# Altium PCB FTDI ToolKit.PcbDoc
Units mil, origin at the board's own origin, x right, y up, seen from the top; angles counter-clockwise.
Board outline 2665 x 1825 mil, 2 copper layers (Top Layer, Bottom Layer); 82 components, 91 nets, 360 pads, 101 vias.
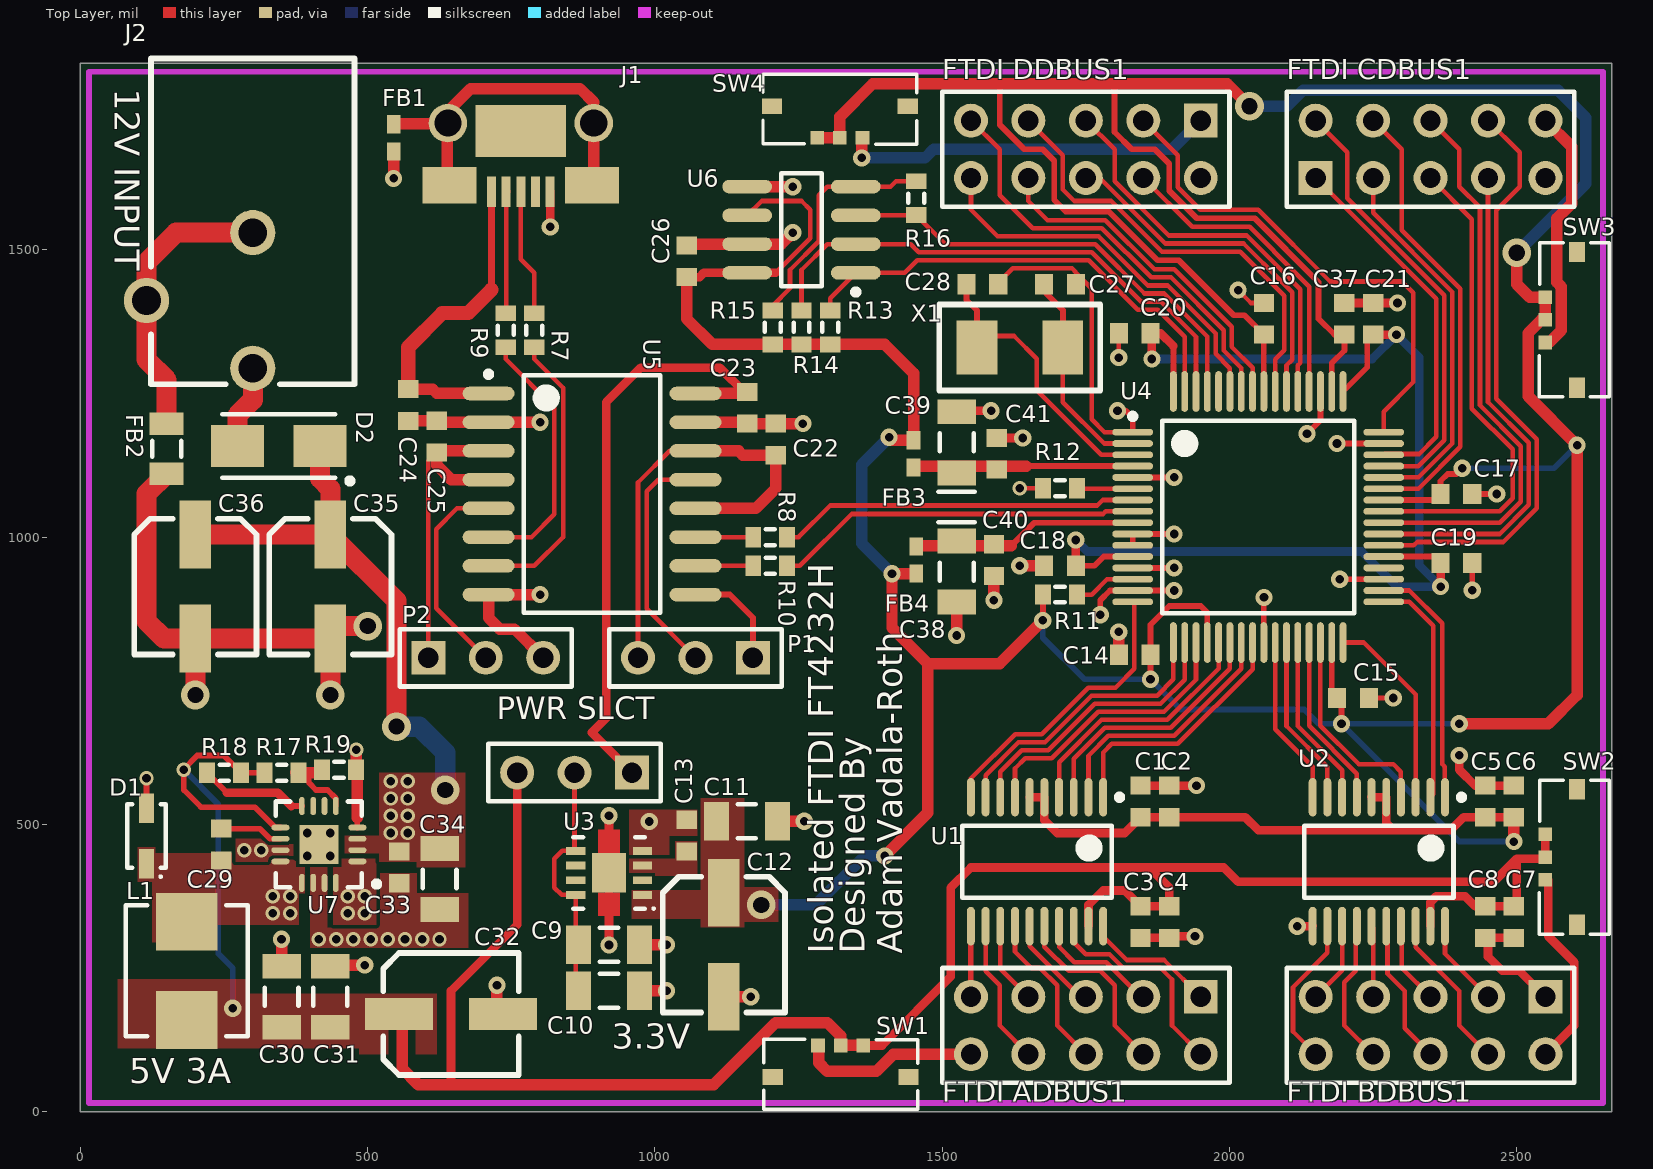
[diagram p0: Top Layer view]
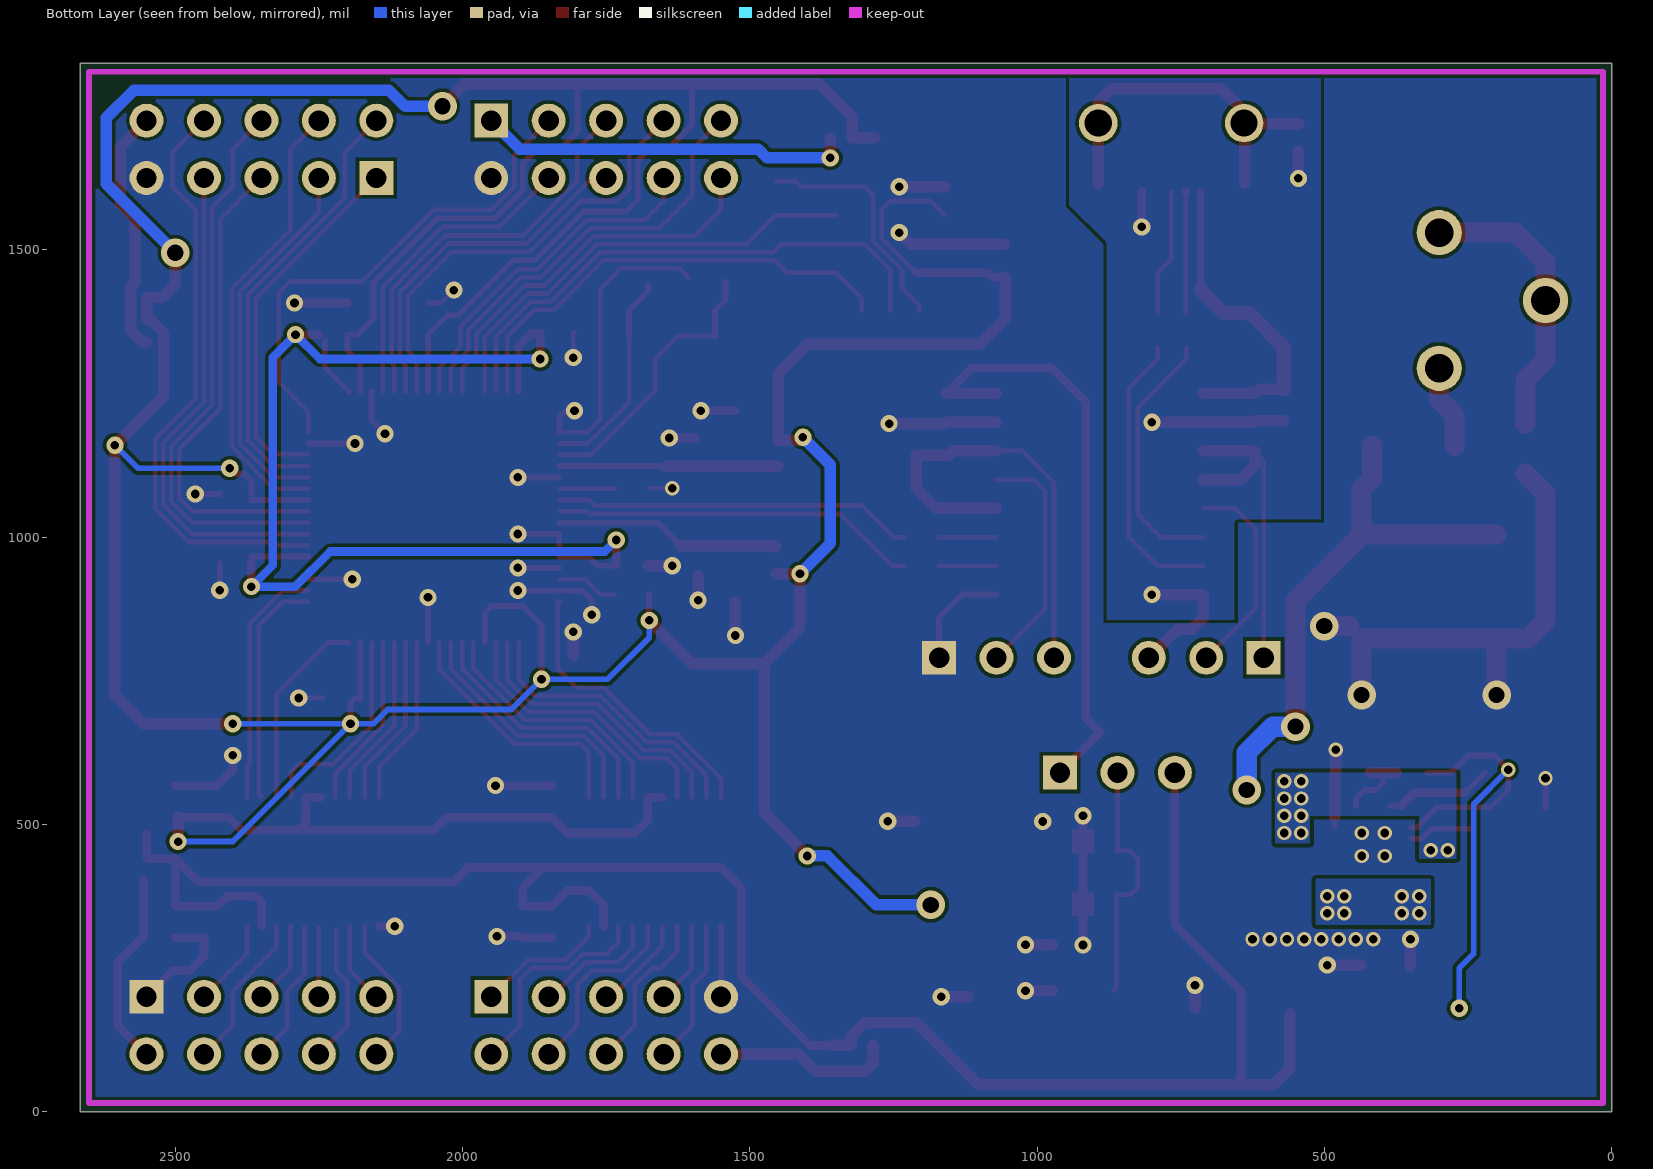
[diagram p1: Bottom Layer view, seen from below]

## Layer stack, top to bottom
Top Layer: signal copper 1.4
Dielectric: dielectric 12.6, FR-4, Dk 4.8
Bottom Layer: signal copper 1.4

## Board outline
0,0 0,1825 2665,1825 2665,0

## Design rules (kind name [scope] priority, off if disabled: settings)
Clearance [All] p1: gap=6
ComponentClearance [All] p1: gap=0 collisioncheckmode=3 verticalgap=10 showdistances=FALSE
FanoutControl Fanout_SOIC [(InComponent('U8') AND InComponent('U7'))] p3: bgadir=Out bgaviamode=Centered fanoutstyle=Staggered fanoutdirection=Alternating viagrid=1 // Fanout_SOIC (Default Rule)
FanoutControl Fanout_Small [All] p4: bgadir=Out bgaviamode=Centered fanoutstyle=Auto fanoutdirection=Alternating viagrid=1 // Fanout_Small (Default Rule)
HoleSize [All] p1: absolutevalues=TRUE maxlimit=120 minlimit=1 maxpercent=80.000 minpercent=20.000
MinimumSolderMaskSliver [All] p1 off: minsoldermaskwidth=10
PlaneConnect [All] p1: planeconnectstyle=Direct reliefexpansion=20 reliefentries=4 reliefconductorwidth=10 reliefairgap=10
PolygonConnect [All] p1: connectstyle=Direct reliefconductorwidth=45 reliefentries=4 polygonreliefangle="90 Angle" airgapwidth=10
RoutingVias [All] p1: holewidth=15 width=25 viastyle="Through Hole" minholewidth=15 minwidth=25 maxholewidth=28 maxwidth=50
SilkToSilkClearance [All] p1 off: silktosilkclearance=10
SilkToSolderMaskClearance SilkscreenOverComponentPads [IsPad] p1 off: minsilkscreentomaskgap=10 clearancetoexposedcopper=TRUE
SolderMaskExpansion [All] p1: expansion=4
Width [All] p1: maxlimit=200 minlimit=6 preferedwidth=6 minimp=50.000000 maximp=50.000000 favimp=50.000000
20 further rules are at their usual default settings.

## Classes and differential pairs
component class "FTDI ToolKit Ports": C1 C2 C3 C4 C5 C6 C7 C8 "FTDI ADBUS1" "FTDI BDBUS1" "FTDI CDBUS1" "FTDI DDBUS1" SW1 SW2 SW3 SW4 U1 U2
component class "FTDI ToolKit FTDI & USB": C9 C10 C11 C12 C13 C14 C15 C16 C17 C18 C19 C20 C21 C22 C23 C24 C25 C26 C27 C28 C29 C30 C31 C32 C33 C34 C35 C36 C37 C38 C39 C40 C41 D1 D2 FB1 FB2 FB3 FB4 J1 J2 L1 P1 P2 "PWR SLCT" R7 R8 R9 R10 R11 R12 R13 R14 R15 R16 R17 R18 R19 U3 U4 U5 U6 U7 X1

## Components (designator, comment, footprint, x,y, rotation, side; value= is the part's Value field where it differs from the comment)
C1 "0603" 1608[0603] 1845,540 r270 top
C2 "0603" 1608[0603] 1895,540 r270 top
C3 "0603" 1608[0603] 1845,330 r90 top
C4 "0603" 1608[0603] 1895,330 r90 top
C5 "0603" 1608[0603] 2445,540 r270 top
C6 "0603" 1608[0603] 2495,540 r270 top
C7 "0603" 1608[0603] 2495,330 r90 top
C8 "0603" 1608[0603] 2445,330 r90 top
C9 "1206 Tantulum" C1206 920,290.55 r0 top
C10 "1206 Tantulum" C1206 920,210.55 r180 top
C11 "1206 Tantulum" C1206 1160,505.55 r0 top
C12 "VS C" "Panasonic VS C" 1235,170.55 r90 top
C13 "0603" 1608[0603] 1055,480.55 r270 top
C14 "0603" 1608[0603] 1835,795 r0 top
C15 "0603" 1608[0603] 2215,720 r180 top
C16 "0603" 1608[0603] 2060,1380 r270 top
C17 "0603" 1608[0603] 2395,1075 r180 top
C18 "0603" 1608[0603] 1705,950 r0 top
C19 "0603" 1608[0603] 2395,955 r180 top
C20 "0603" 1608[0603] 1835,1355 r0 top
C21 "0603" 1608[0603] 2250,1380 r270 top
C22 "0603" 1608[0603] 1210.47,1170 r270 top
C23 "0603" 1608[0603] 1160.47,1225 r90 top
C24 "0603" 1608[0603] 570.47,1230 r90 top
C25 "0603" 1608[0603] 620.47,1175 r270 top
C26 "0603" 1608[0603] 1055,1480 r270 top
C27 "0603" 1608[0603] 1705,1440 r180 top
C28 "0603" 1608[0603] 1570,1440 r180 top
C29 "Cap Semi" 1608[0603] 245,465 r90 top
C30 "1206" C1206 350,200 r270 top
C31 "Cap Semi" C1206 435,200 r90 top
C32 "VS C" "Panasonic VS C" 765,285 r180 top
C33 "0603" 1608[0603] 555,425 r90 top
C34 "1206" C1206 625,405 r90 top
C35 "VS C" "Panasonic VS C" 550,793.78 r90 top
C36 "VS C" "Panasonic VS C" 315,793.78 r90 top
C37 "0603" 1608[0603] 2200,1380 r270 top
C38 "1206" C1206POL 1525,940 r270 top
C39 "1206" C1206POL 1525,1165 r90 top
C40 "0603" 1608[0603] 1590,960 r90 top
C41 "0603" 1608[0603] 1595,1145 r270 top
D1 "PMEG1030EH_EJ" PMEG1030EH_EJ 115,480 r270 top
D2 "PMEG4050EP" PMEG4050EP 345,1158.78 r180 top
FB1 "BLM18PG121SN1D" BLM18PG121SN1D 545,1695 r270 top
FB2 "MI0805L301R-10" "SM 0805 - gap trimmed" 150,1153.78 r90 top
FB3 "BLM18PG121SN1D" BLM18PG121SN1D 1450,1145 r90 top
FB4 "BLM18PG121SN1D" BLM18PG121SN1D 1455,960 r270 top
"FTDI ADBUS1" "Header 5X2" HDR2X5 1950,200 r180 top
"FTDI BDBUS1" "Header 5X2" HDR2X5 2550,200 r180 top locked
"FTDI CDBUS1" "Header 5X2" HDR2X5 2150,1625 r0 top locked
"FTDI DDBUS1" "Header 5X2" HDR2X5 1950,1725 r180 top locked
J1 "DX4R005J91R5100" "Micro USB Circular Holes Only" 765.47,1760 r180 top
J2 "Center-positive 2.1 mm power jack" PJ-102AH 300,1293.78 r0 top
L1 "Inductor" CIP0530LR3R3 185,245 r270 top
P1 "Header 3" HDR1X3 1170.47,790 r180 top
P2 "Header 3" HDR1X3 605.47,790 r0 top
"PWR SLCT" "Header 3" HDR1X3 960,590 r180 top
R7 "0603" J1-0603 790,1360 r270 top
R8 "0603" J1-0603 1200.47,1000 r0 top
R9 "0603" J1-0603 740,1360 r270 top
R10 "0603" J1-0603 1200.47,950 r0 top
R11 "0603" J1-0603 1705,900 r180 top
R12 "0603" J1-0603 1705,1085 r180 top
R13 "0603" J1-0603 1305,1365 r270 top
R14 "0603" J1-0603 1255,1365 r270 top
R15 "0603" J1-0603 1205,1365 r270 top
R16 "0603" J1-0603 1455,1590 r270 top
R17 "Res3" J1-0603 350,590 r180 top
R18 "Res3" J1-0603 250,590 r180 top
R19 "Res3" J1-0603 450,595 r180 top
SW1 "SSAJ120100" SSAJ120100 1205,60 r0 top
SW2 "SSAJ120100" SSAJ120100 2605,325 r90 top
SW3 "SSAJ120100" SSAJ120100 2605,1260 r90 top
SW4 "SSAJ120100" SSAJ120100 1440,1750 r180 top
U1 "TXB0108" TXB0108 1665,435 r270 top
U2 "TXB0108" TXB0108 2260,435 r270 top
U3 "TPS73733QDRBRQ1" TI-DRB8-1750X1500TP_V 920,415.55 r180 top
U4 "FT4232HL-Reel" LQFP-64_N 2050,1035 r0 top
U5 "ADuM4160" ADuM4160 890.47,1075 r0 top
U6 "AT93C46" SOIC127P600X175-8N 1255,1535 r180 top
U7 "MIC24085" MIC24085-AYML 415,465 r180 top
X1 "12MHZ" 445C35A12M00000 1710,1330 r180 top

## Footprints (in the part's own frame and the unit in brackets; to place one, negate y for a bottom-side part, rotate by r counter-clockwise, add the part's x,y. Pads: shape width x height; smd on the part's side, far side on the other; paste and mask are expansions set on the pad)
445C35A12M00000 [mm] "Crystal Oscillator"
  rect 1.8x2.4 smd: 1(0,0) 2(3.8,0)
  silkscreen extent -1.65,-1.91 5.46,1.91, body extent -1.27,-1.52 5.08,1.52, height 1
1608[0603] [mm] "Chip Capacitor, Body 1.6x0.8mm, IPC High Density"
  rect 0.8x0.9 smd: 1(-0.7,0) 2(0.7,0)
  body extent -0.87,-0.48 0.87,0.48, height 1.3
ADuM4160 [mm] "SOIC, 16-Leads, Body 10.30x7.50mm, Pitch 1.27mm, IPC Medium Density"
  oval 2.3x0.6 smd: 1(-4.575,4.445) 2(-4.575,3.175) 3(-4.575,1.905) 4(-4.575,0.635) 5(-4.575,-0.635) 6(-4.575,-1.905) 7(-4.575,-3.175) 8(-4.575,-4.445) 9(4.575,-4.445) 10(4.575,-3.175) 11(4.575,-1.905) 12(4.575,-0.635) 13(4.575,0.635) 14(4.575,1.905) 15(4.575,3.175) 16(4.575,4.445)
  silkscreen extent -4.7,-5.25 3.03,5.42, body extent -3.8,-5.25 3.8,5.25, height 2.65
BLM18PG121SN1D [mm] "Chip Inductor, 2-Leads, Body 1.0x0.5mm, IPC Medium Density"
  rect 0.8x0.6 smd: 1(-0.6,0) 2(0.6,0)
  body extent -0.52,-0.28 0.53,0.27, height 0.6
C1206 [mm] "Chip Capacitor, Body 3.2x1.6mm, IPC High Density"
  rect 1.1x1.7 smd: 1(-1.35,0) 2(1.35,0)
  silkscreen extent -0.4,-0.75 0.4,0.75, body extent -1.7,-0.9 1.7,0.9, height 1.3
C1206POL [mm] "Chip Capacitor, Body 3.2x1.6mm, IPC High Density"
  rect 1.1x1.7 smd: 1(-1.35,0) 2(1.35,0)
  silkscreen extent -2.18,-0.8 0.4,0.8, body extent -1.7,-0.9 1.7,0.9, height 1.3
CIP0530LR3R3 [mm] "Precision Wire Wound Inductor, 2-Leads, Body 5.58x5.30mm, IPC Medium Density"
  rect 2.55x2.7 smd: 1(-2.175,0) 2(2.175,0)
  silkscreen extent -2.9,-2.7 2.9,2.7, body extent -2.88,-2.7 2.88,2.7, height 2.29
HDR1X3 [mm] "Connector; Header; 3 Position"
  rect 1.5x1.5 hole 0.9: 1(0,0)
  round 1.5 hole 0.9: 2(2.54,0) 3(5.08,0)
  silkscreen extent -1.27,-1.27 6.35,1.27
HDR2X5 [mm] "Connector; Header; 5x2 Position"
  rect 1.5x1.5 hole 0.9: 1(0,0)
  round 1.5 hole 0.9: 2(0,2.54) 3(2.54,0) 4(2.54,2.54) 5(5.08,0) 6(5.08,2.54) 7(7.62,0) 8(7.62,2.54) 9(10.16,0) 10(10.16,2.54)
  silkscreen extent -1.27,-1.27 11.43,3.81
J1-0603 [mm] "Chip Resistor, Body 1.6x0.8mm, IPC High Density"
  rect 0.7x0.9 smd: 1(-0.75,0) 2(0.75,0)
  silkscreen extent -0.2,-0.35 0.2,0.35, body extent -0.85,-0.48 0.85,0.48, height 0.9
LQFP-64_N [mm] "Thin QFP, 64-Leads, Body 10x10mm, Pitch 0.5mm, IPC Medium Density"
  oval 1.8x0.3 smd: 1(-5.55,3.75) 2(-5.55,3.25) 3(-5.55,2.75) 4(-5.55,2.25) 5(-5.55,1.75) 6(-5.55,1.25) 7(-5.55,0.75) 8(-5.55,0.25) 9(-5.55,-0.25) 10(-5.55,-0.75) 11(-5.55,-1.25) 12(-5.55,-1.75) 13(-5.55,-2.25) 14(-5.55,-2.75) 15(-5.55,-3.25) 16(-5.55,-3.75) 33(5.55,-3.75) 34(5.55,-3.25) 35(5.55,-2.75) 36(5.55,-2.25) 37(5.55,-1.75) 38(5.55,-1.25) 39(5.55,-0.75) 40(5.55,-0.25) 41(5.55,0.25) 42(5.55,0.75) 43(5.55,1.25) 44(5.55,1.75) 45(5.55,2.25) 46(5.55,2.75) 47(5.55,3.25) 48(5.55,3.75)
  oval 0.3x1.8 smd: 17(-3.75,-5.55) 18(-3.25,-5.55) 19(-2.75,-5.55) 20(-2.25,-5.55) 21(-1.75,-5.55) 22(-1.25,-5.55) 23(-0.75,-5.55) 24(-0.25,-5.55) 25(0.25,-5.55) 26(0.75,-5.55) 27(1.25,-5.55) 28(1.75,-5.55) 29(2.25,-5.55) 30(2.75,-5.55) 31(3.25,-5.55) 32(3.75,-5.55) 49(3.75,5.55) 50(3.25,5.55) 51(2.75,5.55) 52(2.25,5.55) 53(1.75,5.55) 54(1.25,5.55) 55(0.75,5.55) 56(0.25,5.55) 57(-0.25,5.55) 58(-0.75,5.55) 59(-1.25,5.55) 60(-1.75,5.55) 61(-2.25,5.55) 62(-2.75,5.55) 63(-3.25,5.55) 64(-3.75,5.55)
  silkscreen extent -5.67,-4.25 4.25,4.57, body extent -5,-5 5,5, height 1.6
MIC24085-AYML [mm] "QFN, 16-Leads, Body 3.25x3.25mm, Pitch 0.50mm, Thermal Pad 1.73x1.73mm, IPC Medium Density"
  oval 0.8x0.25 smd: 1(-1.7,0.75) 2(-1.7,0.25) 3(-1.7,-0.25) 4(-1.7,-0.75) 9(1.7,-0.75) 10(1.7,-0.25) 11(1.7,0.25) 12(1.7,0.75)
  oval 0.25x0.8 smd: 5(-0.75,-1.7) 6(-0.25,-1.7) 7(0.25,-1.7) 8(0.75,-1.7) 13(0.75,1.7) 14(0.25,1.7) 15(-0.25,1.7) 16(-0.75,1.7)
  rect 1.73x1.73 smd: 17(0,0)
  silkscreen extent -2.68,-1.9 1.9,1.9, body extent -1.75,-1.75 1.75,1.75, height 0.85
"Micro USB Circular Holes Only" [mm]
  rect 0.4x1.35 smd: 1(1.275,4.025) 2(0.625,4.025) 3(-0.025,4.025) 4(-0.675,4.025) 5(-1.325,4.025)
  rect 2.4x1.6 smd: 6(3.125,3.75) 9(-3.175,3.75)
  round 1.7 hole 1.2: 7(3.2,1) 8(-3.25,1)
  rect 4x2.3 smd: GND(-0.025,1.35)
  body extent -4.1,-1.64 4.1,3.79, height 2.73
"Panasonic VS C" [mm]
  rect 3x1.4 smd: 1(5.348,2.921) 2(0.748,2.921)
  silkscreen extent 0.05,0.22 6.05,5.62
PJ-102AH [mm] "Center positive 2.1 mm power jack"
  round 2 hole 1.27: 1(0,0) 2(0,6) 3(-4.7,3)
  silkscreen extent -4.5,-0.7 4.5,13.7, body extent -5.8,-0.7 4.5,13.7, height 11
PMEG1030EH_EJ [mm] "Molded Diode, 2-Leads, Body 2.60x1.60mm, IPC Medium Density"
  rect 1.3x0.65 smd: 1(-1.225,0) 2(1.225,0)
  silkscreen extent -1.4,-0.85 1.85,0.85, body extent -1.35,-0.85 1.35,0.85, height 1.2
PMEG4050EP [mm] "PMEG4050EP NXP SMD Schottky Diode"
  rect 2.35x1.85 smd: 1(-1.825,0) 2(1.825,0)
  silkscreen extent -3.28,-1.4 2.5,1.67, body extent -2.5,-1.35 2.5,1.35, height 1.1
"SM 0805 - gap trimmed" [mm]
  rect 1x1.5 smd: 1(-1.1,0) 2(1.1,0)
  silkscreen extent -0.36,-0.64 0.35,0.63
SOIC127P600X175-8N [mm] "SOIC, 8-Leads, Body 4.90x3.90mm, Pitch 1.27mm, IPC Medium Density"
  oval 2.2x0.6 smd: 1(-2.4,1.905) 2(-2.4,0.635) 3(-2.4,-0.635) 4(-2.4,-1.905) 5(2.4,-1.905) 6(2.4,-0.635) 7(2.4,0.635) 8(2.4,1.905)
  silkscreen extent -2.53,-2.5 0.9,2.88, body extent -2,-2.5 2,2.5, height 1.75
SSAJ120100 [mm] "SSAJ120100"
  rect 0.6x0.6 smd: 1(2,1.4) 2(3,1.4) 3(4,1.4)
  rect 0.9x0.7 smd: ""(0,0) ""(6,0)
  silkscreen extent -0.41,-1.42 6.4,1.68, body extent -0.25,-2.47 6.25,1.5, height 0.7
TI-DRB8-1750X1500TP_V [mm] "SON, 8-Leads, Body 3x3mm, Pitch 0.65mm, Thermal Pad 1.50 x 3.8mm"
  rect 0.85x0.35 smd: 1(-1.475,0.975) 2(-1.475,0.325) 3(-1.475,-0.325) 4(-1.475,-0.975) 5(1.475,-0.975) 6(1.475,-0.325) 7(1.475,0.325) 8(1.475,0.975)
  rect 1.5x1.75 smd: 9(0,0)
  Top Layer region: 0.185,0.875 0.185,1.9 0.465,1.9 0.465,0.875
  Top Layer region: -0.185,-0.875 -0.185,-1.9 -0.465,-1.9 -0.465,-0.875
  Top Layer region: 0.185,-0.875 0.185,-1.9 0.465,-1.9 0.465,-0.875
  Top Layer region: -0.185,0.875 -0.185,1.9 -0.465,1.9 -0.465,0.875
  silkscreen extent -2.02,-1.58 1.57,1.62, body extent -1.5,-1.5 1.5,1.5, height 1
TXB0108 [mm] "TSOP, 20-Leads, Body 6.50x4.40mm, Pitch 0.65mm, IPC Medium Density"
  oval 1.7x0.35 smd: 1(-2.85,2.925) 2(-2.85,2.275) 3(-2.85,1.625) 4(-2.85,0.975) 5(-2.85,0.325) 6(-2.85,-0.325) 7(-2.85,-0.975) 8(-2.85,-1.625) 9(-2.85,-2.275) 10(-2.85,-2.925) 11(2.85,-2.925) 12(2.85,-2.275) 13(2.85,-1.625) 14(2.85,-0.975) 15(2.85,-0.325) 16(2.85,0.325) 17(2.85,0.975) 18(2.85,1.625) 19(2.85,2.275) 20(2.85,2.925)
  silkscreen extent -2.97,-3.3 1.6,3.78, body extent -2.25,-3.3 2.25,3.3, height 1.2

## Part data
C1 C2 C3 C4 C5 C6 C7 C8 C9 C10 C11 C12 C13 C14 C15 C16 C17 C18 C19 C20 C21 C22 C23 C24 C25 C26 C27 C28 C30 C32 C33 C34 C37 C40 C41: library part "Cap Semi", "Capacitor (Semiconductor SIM Model)"
C29 C31: "Capacitor (Semiconductor SIM Model)"
C35 C36 C38 C39: library part "Cap Pol3", "Polarized Capacitor (Surface Mount)"
D1 D2: library part Diode, "Default Diode"
FB2: library part Inductor, "Inductor"
"FTDI ADBUS1" "FTDI BDBUS1" "FTDI CDBUS1" "FTDI DDBUS1": "Header, 5-Pin, Dual row"
J1: library part "Micro USB", "Micro USB Jack B"
J2: library part PWR2.5, "Power jack"
P1 P2 "PWR SLCT": "Header, 3-Pin"
R7 R8 R9 R10 R11 R12 R13 R14 R15 R16: library part Res3, "Resistor"
R17 R18 R19: "Resistor"
SW1 SW2 SW3 SW4: "Slide Switch SMD"
U1 U2: "Ti TXB0108 Bidirectional Level Translator"
U3: "Single Output Automotive LDO, 1 A, Fixed 3.3 V Output, 2.2 to 5.5 V Input, with Reverse Current Protection, 8-pin SON (DRB), -40 to 125 degC, Green (RoHS & no Sb/Br)"
U4: "Quad High Speed USB To Multipurpose UART/MPSSE IC, 64-pin LQFP, Tape and Reel"
U5: "USB Opto Isolator"
X1: library part XTAL, "Crystal Oscillator"

## Via types
v1: diameter 30, hole 15, Top Layer to Bottom Layer, 59 vias
v2: diameter 25, hole 15, Top Layer to Bottom Layer, 34 vias
v3: diameter 50, hole 28, Top Layer to Bottom Layer, 8 vias

## Nets (pads, with @x,y where several pads share a name; then routed paths per layer and width w, separated by ;. In a path a pad name is that pad's centre, name@x,y a point inside that pad or via, vN(x,y) a via of type N, cw(c..) or ccw(c..) an arc to the next point about the centre after c; other vN are vias at no path point)
3.3VCC: C1.2 C2.2 C5.2 C6.2 C11.1 C12.1 C14.2 C15.2 C16.2 C17.2 C26.2 C37.2 FB3.2 FB4.2 R11.2 R13.2 R14.2 R15.2 SW3.2 SW3.3 SW4.2 SW4.3 U1.5 U1.6 U2.5 U2.6 U3.1 U4.20 U4.31 U4.42 U4.50 U4.56 U6.6 U6.8 | length 9963.9
  Top Layer w8: U6.6 1185.51,1585 1255,1585 1270,1570 1270,1520 1210,1460
  Top Layer w10: 1600,1788.75 1600,1717.69 1642.69,1675 1675,1675 1695,1655 1695,1586.72 1715,1566.72 1789.9,1566.72 1874.62,1482 1911.79,1482 2007.57,1386.22 2026.22,1386.22 C16.2@2059.84,1352.6 ; v1@1675.47,855.47 R11.2 ; 1800,1780 1800,1705 1830,1675 1870,1675 1895,1650 1895,1602.89 1942.89,1555 2043.79,1555 2155,1443.79 2155,1380 2182.56,1352.44 C37.2 2200,1325 2177.95,1302.95 U4.50 ; v1(1862.56,752.44) C14.2 1862.56,847.56 1895,880 1950,880 1961.42,868.58 U4.20 ; U4.56 C16.2@2059.84,1352.6 ; C16.2 C16.2@2059.84,1352.6 ; C15.2@2177.95,717.09 U4.31 ; C15.2 2195,712.44 v1(2195,675) ; U4.42 C17.2@2367.91,1064.53 ; C17.2 2367.44,1097.44 2380,1110 2395,1110 v1(2405,1120)
  Top Layer w15: C26.2 1077.44,1452.44 1085,1460 U6.8 1210,1460 ; U1.6 U1.5 1677.8,507.2 1700,485 1817.56,485 C1.2 C2.2 2027.56,512.44 2050,490 2285,490 ; U2.6 U2.5 2272.8,502.2 2285,490 ; C6.2 C5.2 2407.44,512.44 2385,490 2285,490
  Top Layer w20: C26.2 1055,1380 1099.53,1335.47 R15.2 R14.2 R13.2 1399.53,1335.47 1450,1285 FB3.2 1412.56,1168.62 v1(1407.56,1173.62) ; SW4.3 SW4.2 1321.89,1731.89 1378.75,1788.75 1600,1788.75 1996.25,1788.75 v3(2035,1750) ; v1(1400,445) 1475,520 1475,780 ; FB4.2 v1(1412.56,936.38) 1412.56,842.44 1475,780 ; v1@1675.47,855.47 v1(1675,855) 1600,780 1475,780 ; v1(2400,675) 2555,675 2605,725 v1(2605,1160) 2520,1245 2520,1355.11 2543,1378.11 SW3.2 SW3.3 2522.52,1417.48 2500,1440 v3(2500,1495) ; v1(2495,470) C6.2
  Bottom Layer w10: v1(1675,855) 1675,825 1747.56,752.44 v1(1862.56,752.44) 1915,700 2130,700 2155,675 v1(2195,675) ; v1(2400,675) v1(2195,675) ; v1(2405,1120) 2565,1120 v1(2605,1160) ; v1(2495,470) 2400,470 v1(2195,675)
  Bottom Layer w20: v3(1185,360) 1280,360 1365,445 v1(1400,445) ; v1(1407.56,1173.62) 1360,1126.06 1360,988.94 v1(1412.56,936.38) ; v3(2035,1750) 2100.01,1750 2128.04,1778.03 2571.96,1778.03 2620,1729.99 2620,1615 v3(2500,1495)
5VCC: "PWR SLCT.3" C3.2 C4.2 C7.2 C8.2 C30.2 C31.1 C32.1 L1.2 R17.2 R18.1 SW1.2 SW1.3 SW2.2 SW2.3 U1.19 U2.19 U7.9 | length 4441.5
  Top Layer w10: R17.2 R18.1 249.53,620 203.42,620 180,596.58 v2(180,595) 180,560 210,530 303.43,530 338.9,494.53 U7.9
  Top Layer w15: 645,46.97 645,210 760,325 760,590 ; SW1.3@1357.48,115.12 1395.12,115.12 1515,235 1515,390 1550,425 1860,425 ; U1.19 1754.57,359.57 1780,385 1817.56,385 C3.2@1842.56,360 ; C3.2 C4.2 1895,390 1860,425 ; U2.19 2349.57,364.57 2360,375 2410,375 2427.44,357.56 C8.2 C7.2 ; C7.2@2500,357.56 2500,440 ; SW2.2 2546.77,440 2500,440 ; SW2.2@2549.88,450 SW2.3 ; 1860,425 1990,425 2015,400 2460,400 2500,440
  Top Layer w20: C32.1@560,170 560,75 588.03,46.97 645,46.97 1101.97,46.97 1210,155 1300,155 1323.11,131.89 SW1.2 SW1.3@1357.48,115.12
  Bottom Layer w10: v2(180,595) 240,535 240,275 265,250 v1(265,180)
ASBUS0: U1.10 U4.16 | length 513.9
  Top Layer w8: U1.10 1549.84,579.84 1627,657 1673.01,657 1754.01,738 1801.59,738 1834.19,770.6 U4.16@1834.19,884.67
  Top Layer w10: U4.16 U4.16@1834.19,884.67
ASBUS1: U1.9 U4.17 | length 498.6
  Top Layer w8: U1.9 1575.43,585.63 1632.8,643 1678.8,643 1759.8,724 1874,724 1902.36,752.36 U4.17
ASBUS2: U1.8 U4.18 | length 496.2
  Top Layer w8: U1.8 1601.02,591.43 1638.6,629 1684.6,629 1765.6,710 1880,710 1922.05,752.05 U4.18
ASBUS3: U1.7 U4.19 | length 493.9
  Top Layer w8: U1.7 1626.61,597.22 1644.4,615 1690.4,615 1771.4,696 1886,696 1941.73,751.73 U4.19
ASBUS4: U1.4 U4.21 | length 451.5
  Top Layer w8: U1.4 1703.39,608.18 1777.2,682 1891.8,682 1981.1,771.3 U4.21
ASBUS5: U1.3 U4.22 | length 449.2
  Top Layer w8: U1.3 1728.98,613.98 1783,668 1898,668 2000.79,770.79 U4.22
ASBUS6: U1.2 U4.23 | length 446.6
  Top Layer w8: U1.2 1754.57,619.37 1789.2,654 1903.8,654 2020.47,770.67 U4.23
ASBUS7: U1.1 U4.24 | length 444.4
  Top Layer w8: U1.1 1780.16,625.16 1795,640 1910,640 2040.16,770.16 U4.24
BDBUS0: U2.10 U4.26 | length 296.3
  Top Layer w8: U4.26 2079.53,665.47 2144.84,600.16 U2.10
BDBUS1: U2.9 U4.27 | length 298.8
  Top Layer w8: U4.27 2099.21,671.19 2170.43,599.97 U2.9
BDBUS2: U2.8 U4.28 | length 301.2
  Top Layer w8: U4.28 2118.9,671.3 2196.02,594.18 U2.8
BDBUS3: U2.7 U4.29 | length 303.7
  Top Layer w8: U4.29 2138.58,671.42 2221.61,588.39 U2.7
BDBUS4: U2.4 U4.30 | length 362.5
  Top Layer w8: U4.30 2158.27,671.73 2225,605 2285,605 2298.39,591.61 U2.4
BDBUS5: U2.3 U4.32 | length 342.6
  Top Layer w8: U4.32 2233.5,816.5 2323.98,726.02 U2.3
BDBUS6: U2.2 U4.33 | length 403.8
  Top Layer w8: U4.33 2312.84,887.36 2354.57,845.63 2354.57,552.2 U2.2
BDBUS7: U2.1 U4.34 | length 430.1
  Top Layer w8: U4.34 2312.95,907.05 2370,850 2370,605 2375,600 2375,547.36 U2.1
CDBUS0: "FTDI CDBUS1.8" U4.38 | length 1037.1
  Top Layer w8: U4.38 2320.79,985.79 2326.47,991.47 2476.22,991.47 2535,1050.25 2535,1170 2464,1241 2464,1569 2505,1610 2505,1670 2450,1725
CDBUS1: "FTDI CDBUS1.7" U4.39 | length 871.8
  Top Layer w8: U4.39 2470.43,1005.47 2521,1056.05 2521,1164.2 2450,1235.2 2450,1625
CDBUS2: "FTDI CDBUS1.6" U4.40 | length 981.9
  Top Layer w8: U4.40 2470.31,1025.16 2507,1061.85 2507,1158.4 2436,1229.4 2436,1574 2400,1610 2400,1675 2350,1725
CDBUS3: "FTDI CDBUS1.5" U4.41 | length 850.5
  Top Layer w8: U4.41 2470.2,1044.84 2493,1067.64 2493,1152.6 2422,1223.6 2422,1553 2350,1625
CDBUS4: "FTDI CDBUS1.4" U4.43 | length 794.5
  Top Layer w8: 2250,1725 2300,1675 2300,1534.4 2402,1432.4 2402,1157.17 2329.05,1084.21 U4.43
CDBUS5: "FTDI CDBUS1.3" U4.44 | length 663.2
  Top Layer w8: 2250,1625 2250,1564.6 2388,1426.6 2388,1162.96 2328.93,1103.9 U4.44
CDBUS6: "FTDI CDBUS1.2" U4.45 | length 773.2
  Top Layer w8: 2150,1725 2205,1670 2205,1589.8 2374,1420.8 2374,1168.76 2328.82,1123.58 U4.45
CDBUS7: "FTDI CDBUS1.1" U4.46 | length 641.9
  Top Layer w8: 2150,1625 2360,1415 2360,1174.56 2330.15,1144.72 2269.95,1144.72 U4.46
DDBUS0: "FTDI DDBUS1.3" U4.48 | length 890.7
  Top Layer w8: 1850,1725 1910,1665 1910,1609.1 1949.1,1570 2050,1570 2175,1445 2300,1445 2320,1425 2320,1270 2268.5,1218.5 U4.48
DDBUS1: "FTDI DDBUS1.4" U4.52 | length 549.6
  Top Layer w8: 1850,1625 1935,1540 2035,1540 2119,1456 2119,1455.56 2138.58,1435.98 U4.52
DDBUS2: "FTDI DDBUS1.5" U4.53 | length 707.4
  Top Layer w8: 1750,1725 1800,1675 1800,1619.1 1894.1,1525 2030.2,1525 2105,1450.2 2105,1449.76 2123,1431.76 2123,1303 2118.9,1298.9 U4.53
DDBUS3: "FTDI DDBUS1.6" U4.54 | length 618.2
  Top Layer w8: 1750,1625 1774.3,1625 1888.3,1511 2024.4,1511 2091,1444.4 2091,1443.96 2109,1425.96 2109,1309 2099.21,1299.21 U4.54
DDBUS4: "FTDI DDBUS1.7" U4.55 | length 779.7
  Top Layer w8: 1650,1725 1710,1665 1710,1605 1730,1585 1794.5,1585 1882.5,1497 2018.6,1497 2077,1438.6 2077,1438.17 2095,1420.17 2095,1325 2079.53,1309.53 U4.55
DDBUS5: "FTDI DDBUS1.8" U4.57 | length 612.2
  Top Layer w8: 1650,1625 1650,1585 1683.28,1551.72 1783.69,1551.72 1869.4,1466 1904,1466 2004,1366 2004,1331 2040.16,1294.84 U4.57
DDBUS6: "FTDI DDBUS1.9" U4.58 | length 757.3
  Top Layer w8: 1550,1725 1600,1675 1600,1595 1657.28,1537.72 1777.89,1537.72 1863.6,1452 1898.2,1452 1990,1360.2 1990,1324.8 2020.47,1294.33 U4.58
DDBUS7: "FTDI DDBUS1.10" U4.59 | length 681.5
  Top Layer w8: 1550,1625 1550,1570 1596.28,1523.72 1772.09,1523.72 1857.8,1438 1892.4,1438 1976,1354.4 1976,1319 2000.79,1294.21 U4.59
FB: R17.1 R19.2 U7.5 | length 134.9
  Top Layer w10: 397.26,590 397.26,572.74 410,560 430.11,560 444.53,545.59 U7.5
  Top Layer w20: R17.1@374.53,590 R19.2@420,590
GND: "FTDI ADBUS1.9" "FTDI BDBUS1.1" "FTDI CDBUS1.9" "FTDI DDBUS1.2" C1.1 C2.1 C3.1 C4.1 C5.1 C6.1 C7.1 C8.1 C9.2 C10.1 C11.2 C12.2 C13.1 C14.1 C15.1 C16.1 C17.1 C18.1 C19.1 C20.1 C21.1 C22.1 C23.1 C26.1 C27.1 C28.1 C30.1 C31.2 C32.2 C33.1 C34.1 C35.2 C36.2 C37.1 C38.2 C39.2 C40.1 C41.1 D1.1 FB2.1 P1.1 R12.2 R19.1 U1.11 U2.11 U3.4 U3.9 U4.1 U4.5 U4.10 U4.11 U4.13 U4.15 U4.25 U4.35 U4.47 U4.51 U5.9 U5.15 U6.5 U6.7 U7.4 U7.14 U7.15 U7.17 | length 4826.6
  Top Layer w8: C28.1@1606.28,1451.28 1622.72,1467.72 1725.82,1467.72 1732.56,1460.97 ; v2(1635,1085) R12.2 ; 1732.56,1460 1760,1432.56 1760,1205 1782.36,1182.64 U4.1 ; C20.1@1805,1357.44 C20.1 v1(1807.44,1312.44) ; v1(2015,1430) 2037.44,1407.56 C16.1 ; C15.1 v1(2285.12,720)
  Top Layer w10: D1.1 v2(115,580) ; U7.4 481.93,511.93 ; U5.9 1130,900 1170.47,859.53 P1.1 ; U1.11 1549.84,200.16 1550,200 ; v1(1775,865) 1775,890 1792.05,907.05 U4.15 v1(1903.58,907.05) ; v1(1805,1220) 1820,1220 1831.5,1208.5 U4.1 ; U4.13 v1(1903.58,946.42) ; U4.11 U4.10 v1(1903.58,1005.47) ; U4.5 v1(1903.58,1103.9) ; U4.25 v1@2059.84,894.84 ; v1(2135,1180) 2158.27,1203.27 U4.51 ; v1(2187.05,1162.95) U4.47 ; v1(2191.73,926.73) U4.35 ; v1(2422.56,907.56) C19.1 ; C17.1 v1(2465,1075)
  Top Layer w15: v1(920,290) U3.9 v1(920,515) ; C39.2@1525,1220 v1(1585,1220) ; C41.1 v1(1640,1172.56) ; C3.1 C4.1 1897.56,305 v1(1940,305) ; C1.1 C2.1 v1(1942.56,567.56) ; v1@2059.84,894.84 v1(2060,895) ; v1(2117.8,322.8) U2.11 ; C37.1 C21.1 v1(2292.44,1407.56) ; v1(2400,620) 2400,595 2427.44,567.56 C6.1@2500,567.56 ; C7.1@2500,302.44 2450,302.44 2450,270 2475,245 2505,245 2550,200
  Top Layer w20: C30.1 v1(350,300) ; C31.2@436.85,255 v1(495,255) ; R19.1@480,590.47 v2(480,630) ; 481.93,511.93 R19.1@481.93,586.93 ; C32.2@725,180.55 v1(725,220) ; C10.1 v1(1020,210.55) ; C9.2 v1(1020,290.55) ; C26.1@1057.44,1510 U6.7 1220,1510 v1(1240,1530) ; U5.15 C23.1@1157.91,1200 ; C12.2 v1(1166.85,200) ; C23.1 1210.35,1197.44 C22.1 v1(1257.44,1197.56) ; U6.5 v1(1240,1610) ; C11.2 v1(1260,505.55) ; v1(1525,828.7) C38.2 ; v1(1590,890) C40.1 ; v1(1635,950) C18.1 ; C14.1 v1(1807.44,835)
  Top Layer w35: FB2.1 115,1075.47 115,853.78 145.55,823.23 C36.2 ; v3(200,725) C36.2 ; v3(435,725) C35.2 C36.2 ; C35.2@456.77,845 v3(500,845)
  other v1: 990,505
  other v2: 415,300 445,300 475,300 505,300 535,300 565,300 595,300 625,300 395,445 435,445 395,485 435,485
IGND: C24.1 C25.1 FB1.2 J1.5 P2.3 U5.2 U5.8 | length 589.3
  Top Layer w15: v1(817.64,1540) J1.5
  Top Layer w20: v1(545,1624.41) FB1.2 ; C24.1@570.59,1202.56 C25.1 ; C25.1@623.03,1200 U5.2 v1(800,1200) ; v1(800,900) U5.8 710.35,859.65 730,840 755.47,840 P2.3
NetC9_1: "PWR SLCT.2" C9.1 C10.2 U3.5 U3.8 | length 440.5
  Top Layer w8: 860,590 860,455.87 U3.5 838.94,453.94 825,440 825,390 837.83,377.17 U3.8 861.93,215.47 C10.2
NetC13_2: C13.2 U3.3
NetC18_2: C18.2 C19.2 C20.2 C21.2 U4.12 U4.37 U4.49 U4.64 | length 2189
  Top Layer w10: C18.2 1765,950 1781.1,966.1 U4.12 ; U4.64 1902.36,1332.64 ; U4.49 2240,1295.87 C21.2@2240,1342.44 ; U4.37 C19.2@2367.44,966.1
  Top Layer w15: C18.2@1732.56,951.57 v1(1732.56,995) ; v1(1865,1310) 1865,1355 1880,1355 1902.36,1332.64 ; C21.2 v1(2290.63,1352.44) ; v1(2367.44,913.9) C19.2
  Bottom Layer w15: v1(1732.56,995) 1752.56,975 2230,975 2291.1,913.9 v1(2367.44,913.9) 2330,951.34 2330,1313.07 v1(2290.63,1352.44) 2248.19,1310 v1(1865,1310)
NetC22_2: C22.2 P1.3 U5.12 U5.14 | length 782.7
  Top Layer w8: P1.3 970.47,1095 1025.47,1150 U5.14
  Top Layer w20: U5.12 1175.47,1050 1210.47,1085 C22.2 1153.03,1142.44 1145.47,1150 U5.14
NetC23_2: "PWR SLCT.1" C23.2 U5.16 | length 1058.1
  Top Layer w15: 960,590 890,660 915,685 915,1235 975,1295 1112.91,1295 C23.2@1157.91,1250
  Top Layer w20: U5.16 C23.2@1157.91,1250
NetC24_2: C24.2 J1.1 U5.1 | length 573.3
  Top Layer w12: 715.28,1430.28 J1.1
  Top Layer w20: C24.2 612.91,1257.56 620.47,1250 U5.1
  Top Layer w25: C24.2 570.47,1330.47 630,1390 675,1390 715.28,1430.28
NetC25_2: C25.2 P2.1 U5.3 U5.4 | length 573.7
  Top Layer w8: P2.1 605.47,1132.44 C25.2
  Top Layer w20: C25.2 620.47,1125 645.47,1100 U5.4 ; C25.2@623.03,1150 U5.3
NetC27_2: C27.2 U4.2 X1.1 | length 369.8
  Top Layer w8: X1.1@1710,1350 1710,1235 1782.05,1162.95 U4.2
  Top Layer w10: C27.2 1677.44,1427.56 1710,1395 X1.1@1710,1350
NetC28_2: C28.2 U4.3 X1.2 | length 491.4
  Top Layer w8: X1.2@1560.39,1350 1625,1350 1664.57,1310.43 1664.57,1255.43 1776.73,1143.27 U4.3
  Top Layer w10: C28.2@1542.44,1445 1542.44,1412.56 1560.39,1394.61 X1.2@1560.39,1350
NetC29_2: C29.2 U7.10 | length 110.4
  Top Layer w10: C29.2 312.44,492.56 330.16,474.84 U7.10
NetC38_1: C38.1 C40.2 FB4.1 U4.9 | length 393.7
  Top Layer w10: 1620,985 1660,1025 1685,1025 1685.16,1025.16 U4.9
  Top Layer w20: FB4.1 1456.38,985 1620,985
NetC39_1: C39.1 C41.2 FB3.1 U4.4 | length 381.5
  Top Layer w10: 1646.14,1123.58 U4.4
  Top Layer w20: FB3.1@1450,1123.58 1646.14,1123.58
NetD2_2: D2.2 J2.1 | length 146.1
  Top Layer w35: D2.2 273.15,1211.93 300,1238.78 J2.1
NetFB1_1: FB1.1 J1.6 J1.7 J1.8 J1.9 | length 642.9
  Top Layer w8: J1.7 J1.7@639.49,1740.79 ; J1.9 J1.9@893.43,1615.31 ; J1.8 893.43,1756.82
  Top Layer w20: FB1.1@544.47,1719.39 638.25,1719.39 J1.6@638.25,1616.55 ; J1.7@639.49,1740.79 679.47,1780.77 869.47,1780.77 893.43,1756.82 ; J1.9@893.43,1615.31 J1.8
NetFB2_2: FB2.2 J2.2 J2.3 | length 502.4
  Top Layer w35: FB2.2 150,1273.78 114.96,1308.82 J2.3 114.96,1478.74 166.22,1530 J2.2
"NetFTDI ADBUS1_1": "FTDI ADBUS1.1" U1.20 | length 231.2
  Top Layer w8: U1.20 1780.16,304.84 1821,264 1886,264 1950,200
"NetFTDI ADBUS1_2": "FTDI ADBUS1.2" U1.18 | length 376.4
  Top Layer w8: U1.18 1728.98,295.02 1750,274 1791.2,274 1815.2,250 1880,250 1900,230 1900,150 1950,100
"NetFTDI ADBUS1_3": "FTDI ADBUS1.3" U1.17 | length 218.7
  Top Layer w8: U1.17 1703.39,286.61 1730,260 1785.4,260 1845.4,200 1850,200
"NetFTDI ADBUS1_4": "FTDI ADBUS1.4" U1.16 | length 326.3
  Top Layer w8: U1.16 1677.8,287.2 1720,245 1775,245 1800,220 1800,150 1850,100
"NetFTDI ADBUS1_5": "FTDI ADBUS1.5" U1.15 | length 169.2
  Top Layer w8: U1.15 1652.2,287.8 1740,200 1750,200
"NetFTDI ADBUS1_6": "FTDI ADBUS1.6" U1.14 | length 282.7
  Top Layer w8: U1.14 1626.61,278.39 1655,250 1670,250 1700,220 1700,150 1750,100
"NetFTDI ADBUS1_7": "FTDI ADBUS1.7" U1.13 | length 143.1
  Top Layer w8: U1.13 1601.02,248.98 1650,200
"NetFTDI ADBUS1_8": "FTDI ADBUS1.8" U1.12 | length 253.7
  Top Layer w8: U1.12 1575.43,244.57 1600,220 1600,150 1650,100
"NetFTDI ADBUS1_10": "FTDI ADBUS1.10" SW1.1 | length 313.8
  Top Layer w20: SW1.1@1285,115.12 1285,85 1300,70 1385,70 1415,100 1550,100
"NetFTDI BDBUS1_2": "FTDI BDBUS1.2" SW2.1 | length 343.1
  Top Layer w15: 2550,100 2600,150 2600,260 2554.88,305.12 SW2.1@2554.88,403.74
"NetFTDI BDBUS1_3": "FTDI BDBUS1.3" U2.20 | length 153.8
  Top Layer w8: U2.20 2375.16,274.84 2450,200
"NetFTDI BDBUS1_4": "FTDI BDBUS1.4" U2.18 | length 275
  Top Layer w8: U2.18 2323.98,286.02 2400,210 2400,150 2450,100
"NetFTDI BDBUS1_5": "FTDI BDBUS1.5" U2.17 | length 144.2
  Top Layer w8: U2.17 2300,321.18 2300,250 2350,200
"NetFTDI BDBUS1_6": "FTDI BDBUS1.6" U2.16 | length 254.8
  Top Layer w8: U2.16 2275,320.59 2275,240 2305,210 2305,145 2350,100
"NetFTDI BDBUS1_7": "FTDI BDBUS1.7" U2.15 | length 120
  Top Layer w8: 2250,200 U2.15@2250,320
"NetFTDI BDBUS1_8": "FTDI BDBUS1.8" U2.14 | length 245.2
  Top Layer w8: U2.14@2220,316.18 2220,245 2200,225 2200,150 2250,100
"NetFTDI BDBUS1_9": "FTDI BDBUS1.9" U2.13 | length 141.9
  Top Layer w8: 2150,200 2196.02,246.02 U2.13
"NetFTDI BDBUS1_10": "FTDI BDBUS1.10" U2.12 | length 264
  Top Layer w8: 2150,100 2110.47,139.53 2110.47,216.37 2170.43,276.33 U2.12
"NetFTDI CDBUS1_10": "FTDI CDBUS1.10" SW3.1 | length 434.4
  Top Layer w20: SW3.1 2556.76,1338.74 2577.69,1359.67 2577.69,1435.92 2570,1443.61 2570,1555.09 2595.53,1580.61 2595.53,1679.47 2550,1725
"NetFTDI DDBUS1_1": "FTDI DDBUS1.1" SW4.1 | length 652.3
  Top Layer w10: SW4.1@1360,1693.62 SW4.1
  Top Layer w20: v1(1360,1660) SW4.1@1360,1693.62
  Bottom Layer w20: v1(1360,1660) 1470,1660 1485,1675 1900,1675 1950,1725
NetJ1_2: J1.2 R9.1 | length 212.2
  Top Layer w8: R9.1@741.28,1389.53 J1.2@741.28,1601.13
  Top Layer w15: J1.2 J1.2@741.28,1601.13
NetJ1_3: J1.3 R7.1 | length 221.8
  Top Layer w8: J1.3 766.46,1483.54 790,1460 R7.1
NetP1_2: P1.2 U5.13 | length 418.6
  Top Layer w8: P1.2 985.47,875 985.47,1080 1005.47,1100 U5.13
NetP2_2: P2.2 U5.5 | length 365.4
  Top Layer w8: P2.2 619.47,876 619.47,1014 655.47,1050 U5.5
NetR7_2: R7.2 U5.7 | length 501.5
  Top Layer w8: U5.7 790,950 840,1000 840,1260 790,1310 R7.2
NetR8_1: R8.1 U5.11 | length 100.4
  Top Layer w8: U5.11 R8.1
NetR8_2: R8.2 U4.7 | length 628.5
  Top Layer w8: R8.2 1250.47,1000 1250.47,1000.47 1305,1055 1770,1055 1779.53,1064.53 U4.7
NetR9_2: R9.2 U5.6 | length 456.9
  Top Layer w8: U5.6 785,1000 825,1040 825,1225 740,1310 R9.2
NetR10_1: R10.1 U5.10 | length 100.4
  Top Layer w8: U5.10 R10.1
NetR10_2: R10.2 U4.8 | length 640.8
  Top Layer w8: R10.2 1252.01,950 1342.17,1040.16 1779.91,1040.16 1784.59,1044.84 U4.8
NetR11_1: R11.1 U4.14 | length 108
  Top Layer w8: R11.1 1760,900 1786.73,926.73 U4.14
NetR12_1: R12.1 U4.6 | length 97
  Top Layer w8: R12.1@1734.53,1084.21 U4.6
NetR13_1: R13.1 U4.63 U6.1 | length 815.9
  Top Layer w8: R13.1 1305,1415.51 U6.1 1435,1460 1456.72,1481.72 1754.69,1481.72 1840.41,1396 1875.01,1396 1922.05,1348.96 U4.63
NetR14_1: R14.1 U4.62 U6.2 | length 938.1
  Top Layer w8: R14.1 1255,1465 1300,1510 U6.2 1445,1510 1459.28,1495.72 1760.49,1495.72 1846.21,1410 1880.8,1410 1941.73,1349.07 U4.62
NetR15_1: R15.1 R16.1 U6.4 | length 413.8
  Top Layer w8: R15.1 1205,1403.02 1235,1433.02 1235,1465 1285,1515 1285,1595 1300,1610 U6.4 1410,1610 1419.53,1619.53 R16.1
NetR16_2: R16.2 U4.61 U6.3 | length 794.7
  Top Layer w8: U6.3@1349.96,1560.47 R16.2 1505.76,1509.72 1766.29,1509.72 1852.01,1424 1886.6,1424 1961.42,1349.19 U4.61
PG: R18.2 U7.8 | length 189.3
  Top Layer w10: R18.2 254.75,555.72 254.75,555.25 ; 366.93,531.93 U7.8
  Top Layer w15: 254.75,555.25 343.61,555.25 366.93,531.93
SW: C29.1 D1.2 L1.1 U7.1 U7.12 U7.13 U7.16
  other v2: 335,345 365,345 465,345 495,345 335,375 365,375 465,375 495,375
VIN: C33.2 C34.2 C35.1 C36.1 D2.1 U7.2 U7.3 U7.11 | length 947.6
  Top Layer w35: C36.1 C35.1 ; D2.1 416.85,1101.93 435,1083.78 C35.1 ; v3(550,670) 550,889.33 C35.1
  Bottom Layer w35: v3(550,670) 590,670 635,625 v3(635,560)
  other v2: 285,455 315,455.16 540,485 570,485 540,515 570,515 540,545 570,545 540,575 570,575
pads on no net: J1.4 J1.GND SW1. SW2. SW3. SW4. U3.2 U3.6 U3.7 U4.36 U4.60 U7.6 U7.7

## Polygon pours and split planes (outlines as drawn)
VIN on Bottom Layer "Mechanical 15-No Net" (solid, pour order 14): 585,466.79 525,466.79 525,515 335,515 335,440 270,440 270,590 585,590
SW on Bottom Layer "Mechanical 15-No Net" (solid, pour order 15): 315,405 515,405 515,325 315,325
GND on Bottom Layer "Mechanical 15-No Net" (solid, remove dead copper, pour order 26): 15,1810 15,15 120,15 2650,15 2650,80 2650,1810 950,1810 950,1575 885,1510 885,850 730,850 650,850 650,890.73 650,1025 500,1025 500,1810 15,1810
IGND on Bottom Layer "Mechanical 15-No Net" (solid, remove dead copper, pour order 29): 500,1810 500,1025 650,1025 650,850 885,850 885,1510 950,1575 950,1810
3.3VCC on Top Layer "Mechanical 15-No Net" (solid, remove dead copper, pour order 21): 960,385.55 960,335.55 1080,335.55 1080,320.55 1155,320.55 1155,330.55 1215,330.55 1215,390.55 1155,390.55 1155,545.55 1080,545.55 1080,385.55
GND on Top Layer "Mechanical 15-No Net" (solid, remove dead copper, pour order 24): 955,441.08 955.53,440.55 1025,440.55 1025,480.55 1075,480.55 1075,525.55 955,525.55
NetC13_2 on Top Layer "Mechanical 15-No Net" (solid, remove dead copper, pour order 23): 955,440.55 955,415.55 955,410.55 1075,410.55 1075,470.55 1035,470.55 1035,440.55 955,440.55
5VCC on Top Layer "Mechanical 15-No Net" (solid, pour order 22): 485,110 485,100 620,100 620,205 295,205 295,230 65,230 65,110
VIN on Top Layer "Mechanical 15-No Net" (solid, remove dead copper, pour order 17): 370,445 370,465 335,465 335,475 270,475 270,435 335,435 335,445
GND on Top Layer "Mechanical 15-No Net" (solid, pour order 20): 430,425 400,425 400,285 675,285 675,380 585,380 585,415 520,415 520,320 430,320
SW on Top Layer "Mechanical 15-No Net" (solid, pour order 19): 515,440 450,440 450,425 440,425 440,325 515,325
VIN on Top Layer "Mechanical 15-No Net" (solid, pour order 16): 460,450 460,480 520,480 520,590 670,590 670,425 585,425 585,435 520,435 520,450
SW on Top Layer "Mechanical 15-No Net" (solid, pour order 18): 390,440 390,380 380,380 380,325 235,325 235,295 125,295 125,400 100,400 100,460 130,460 130,450 265,450 265,430 325,430 325,440

## Keep-outs
Keep-Out Layer:
  lines w10: 15,15 15,1810 2650,1810 2650,15 15,15

## Silkscreen, mask and mechanical layers (free items; w line width, h text height)
Top Overlay:
  text "12V INPUT" at 45,1780 h75 r270
  text "Isolated FTDI FT4232H" at 1325,275 h75 r90
  text "Designed By" at 1380,275 h75 r90
  text "Adam Vadala-Roth" at 1445,275 h75 r90
  text "3.3V" at 925,95 h75
  text "5V 3A" at 85,35 h75
Mechanical 15:
  the board outline again, w10